# EAGLE board Valve Board (EAGLE 6.2)
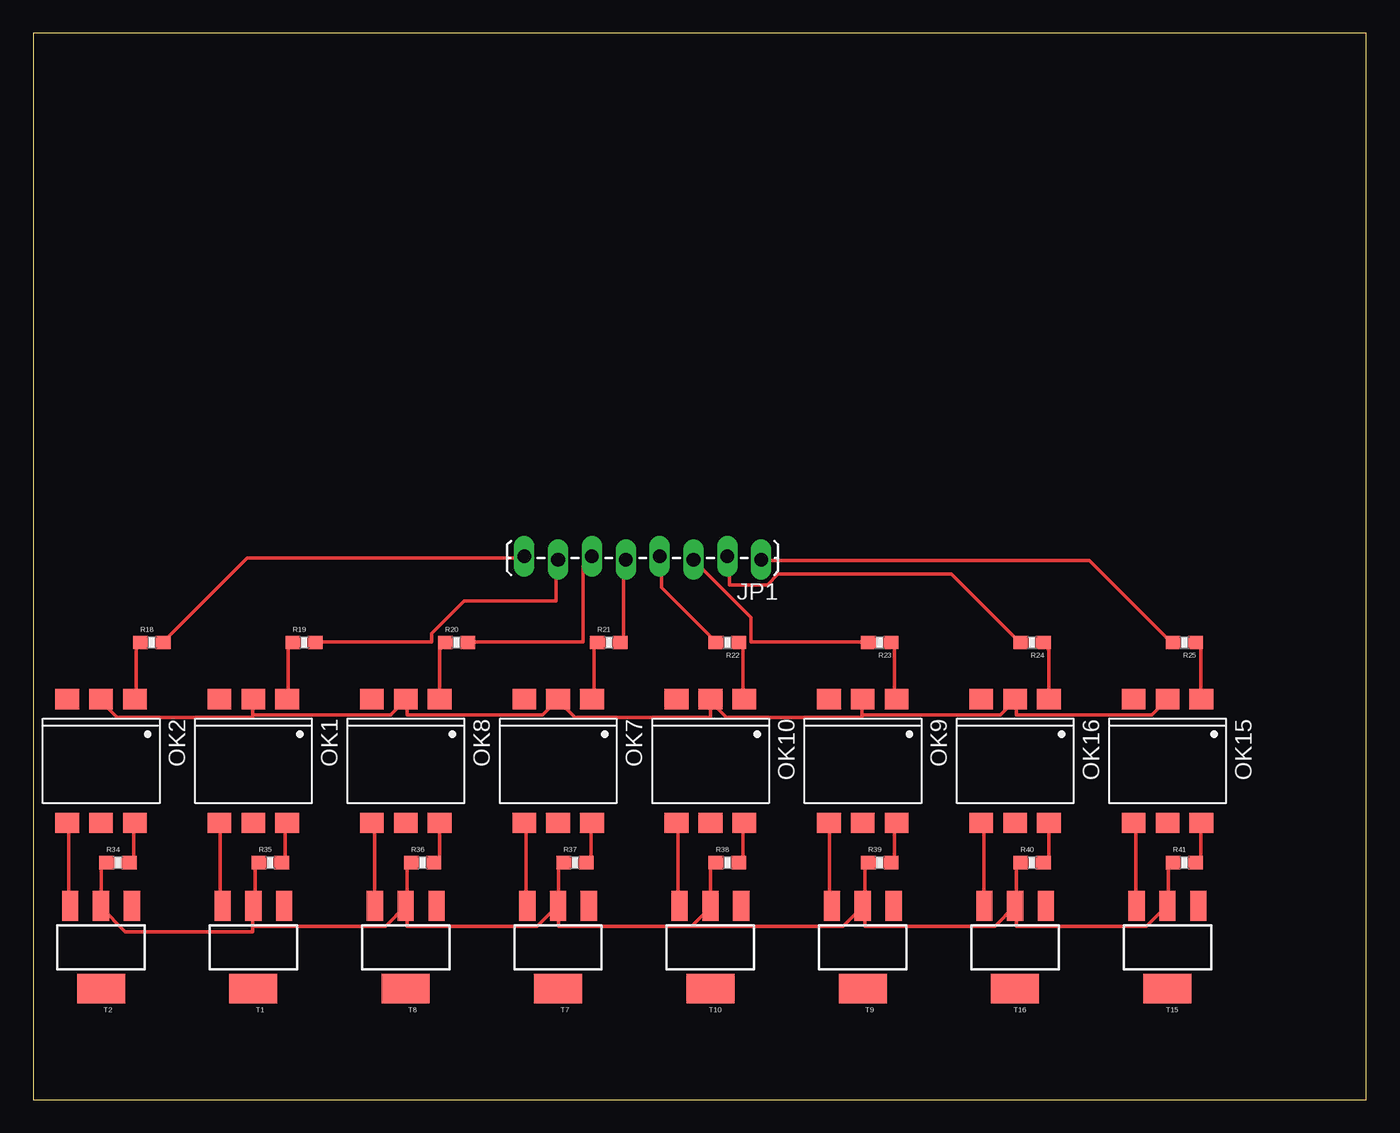
[diagram p0: board, top side]

Size 100 x 80 mm. Coordinates in mm from the lower left corner, seen from the top.
Outline: 0,0 100,0 100,80 0,80 0,0
Copper layers (1*16): Top 0.035mm / dielectric 1.5mm / Bottom 0.035mm
Design rules: minimum track width 10mil, minimum drill 24mil, track to track 8mil, track to pad 8mil, pad to pad 8mil, via to via 8mil, smd to smd 8mil, copper to edge 40mil, drill to drill 8mil, minimum pad ring 10mil, minimum via ring 8mil, stop-mask expansion 4mil, vias tented up to drill 0mil, thermal gap 10mil

## Footprints (pad centres in the part's own frame; a part is rotated, then mirrored left to right if it is on the bottom)
1X08_LOCK_LONGPADS = drill 1.016 long: 1 0,0.127; 2 2.54,-0.127; 3 5.08,0.127; 4 7.62,-0.127; 5 10.16,0.127; 6 12.7,-0.127; 7 15.24,0.127; 8 17.78,-0.127
DIL6-SMD = smd 1.78 x 1.52: 1 -2.54,-4.645; 2 0,-4.645; 3 2.54,-4.645; 4 2.54,4.645; 5 0,4.645; 6 -2.54,4.645
0603-RES = smd 1.1 x 1: 1 -0.85,0; 2 0.85,0
SOT223 = smd 1.219 x 2.235: 1 -2.311,-3.099; 2 0,-3.099; 3 2.311,-3.099 | smd 3.6 x 2.2: 4 0,3.099

## Placement (x,y rotation side)
JP1  [1X08_LOCK_LONGPADS]  54.61,40.64 180 top
OK1  MOC3032S  [DIL6-SMD]  16.51,25.4 180 top
OK2  MOC3032S  [DIL6-SMD]  5.08,25.4 180 top
OK7  MOC3032S  [DIL6-SMD]  39.37,25.4 180 top
OK8  MOC3032S  [DIL6-SMD]  27.94,25.4 180 top
OK9  MOC3032S  [DIL6-SMD]  62.23,25.4 180 top
OK10  MOC3032S  [DIL6-SMD]  50.8,25.4 180 top
OK15  MOC3032S  [DIL6-SMD]  85.09,25.4 180 top
OK16  MOC3032S  [DIL6-SMD]  73.66,25.4 180 top
R18  330  [0603-RES]  8.89,34.29 0 top
R19  330  [0603-RES]  20.32,34.29 0 top
R20  330  [0603-RES]  31.75,34.29 0 top
R21  330  [0603-RES]  43.18,34.29 0 top
R22  330  [0603-RES]  52.07,34.29 180 top
R23  330  [0603-RES]  63.5,34.29 180 top
R24  330  [0603-RES]  74.93,34.29 180 top
R25  330  [0603-RES]  86.36,34.29 180 top
R34  33  [0603-RES]  6.35,17.78 0 top
R35  33  [0603-RES]  17.78,17.78 0 top
R36  33  [0603-RES]  29.21,17.78 0 top
R37  33  [0603-RES]  40.64,17.78 0 top
R38  33  [0603-RES]  52.07,17.78 0 top
R39  33  [0603-RES]  63.5,17.78 0 top
R40  33  [0603-RES]  74.93,17.78 0 top
R41  33  [0603-RES]  86.36,17.78 0 top
T1  LF-TRIACSOT223  [SOT223]  16.51,11.43 180 top
T2  LF-TRIACSOT223  [SOT223]  5.08,11.43 180 top
T7  LF-TRIACSOT223  [SOT223]  39.37,11.43 180 top
T8  LF-TRIACSOT223  [SOT223]  27.94,11.43 180 top
T9  LF-TRIACSOT223  [SOT223]  62.23,11.43 180 top
T10  LF-TRIACSOT223  [SOT223]  50.8,11.43 180 top
T15  LF-TRIACSOT223  [SOT223]  85.09,11.43 180 top
T16  LF-TRIACSOT223  [SOT223]  73.66,11.43 180 top

## Library data of the parts
JP1 = SparkFun-Connectors
OK1 OK2 OK7-OK10 OK15 OK16 = lizardworx; MF: FAIRCHILD SEMICONDUCTOR; MPN: MOC3032S-M; OC_FARNELL: unknown; OC_NEWARK: 05C2871
R18-R25 R34-R41 = SparkFun-Passives
T1 T2 T7-T10 T15 T16 = lizardworx

## Nets
AC_HOT: R34.1 R35.1 R36.1 R37.1 R38.1 R39.1 R40.1 R41.1 T1.2 T2.2 T7.2 T8.2 T9.2 T10.2 T15.2 T16.2
CNTRL_1: JP1.8 R18.2
CNTRL_2: JP1.7 R19.2
CNTRL_3: JP1.6 R20.2
CNTRL_4: JP1.5 R21.2
CNTRL_5: JP1.4 R22.2
CNTRL_6: JP1.3 R23.2
CNTRL_7: JP1.2 R24.2
CNTRL_8: JP1.1 R25.2
GND: OK1.2 OK2.2 OK7.2 OK8.2 OK9.2 OK10.2 OK15.2 OK16.2
N$1: OK9.1 R23.1
N$2: OK1.1 R19.1
N$6: OK1.6 R35.2
N$7: OK9.6 R39.2
N$8: OK1.4 T1.3
N$9: OK2.1 R18.1
N$12: OK2.6 R34.2
N$13: OK9.4 T9.3
N$14: OK2.4 T2.3
N$28: OK10.1 R22.1
N$34: OK10.6 R38.2
N$41: OK10.4 T10.3
N$45: OK7.1 R21.1
N$46: OK7.6 R37.2
N$48: OK7.4 T7.3
N$51: OK8.1 R20.1
N$52: OK8.6 R36.2
N$54: OK8.4 T8.3
N$76: OK15.1 R25.1
N$77: OK15.6 R41.2
N$78: OK15.4 T15.3
N$81: OK16.1 R24.1
N$82: OK16.6 R40.2
N$83: OK16.4 T16.3
STATION_1: T2.1
STATION_2: T1.1
STATION_3: T8.1
STATION_4: T7.1
STATION_5: T10.1
STATION_6: T9.1
STATION_7: T16.1
STATION_8: T15.1

## Tracks (layer width: path | path; a pad name or v marks a point on that pad's centre or on a via)
AC_HOT
  Top 0.254: R41.1 85.34,17.68 85.14,17.48 85.14,14.63 T15.2 84.94,14.43 83.52,13.01 73.76,13.01 73.76,14.43 T16.2 | R40.1 73.97,17.68 73.76,17.48 73.76,14.63 T16.2 | R39.1 62.59,17.68 62.38,17.48 62.38,14.63 T9.2 | R38.1 51.21,17.68 50.8,17.27 T10.2 50.8,14.43 49.38,13.01 | R37.1 39.62,17.68 39.42,17.48 39.42,14.63 T7.2 | R36.1 28.25,17.68 28.04,17.48 28.04,14.63 T8.2 | R34.1 5.49,17.68 5.08,17.27 T2.2 5.08,14.43 6.91,12.6 16.46,12.6 16.46,13.01 | R35.1 16.87,17.68 16.66,17.48 16.66,14.63 T1.2 16.46,14.43 16.46,13.01 | T8.2 26.42,13.01 16.46,13.01 | T7.2 39.22,14.43 37.8,13.01 28.04,13.01 28.04,14.43 T8.2 | 49.38,13.01 39.42,13.01 39.42,14.43 T7.2 | 49.38,13.01 60.76,13.01 62.18,14.43 T9.2 | T16.2 72.14,13.01 62.38,13.01 62.38,14.43 T9.2
CNTRL_1
  Top 0.254: R18.2 9.75,34.34 16.05,40.64 36.78,40.64 JP1.8
CNTRL_2
  Top 0.254: R19.2 21.34,34.34 29.87,34.34 29.87,34.95 32.31,37.39 39.22,37.39 39.22,40.44 JP1.7
CNTRL_3
  Top 0.254: R20.2 32.72,34.34 41.25,34.34 41.25,40.03 41.86,40.64 JP1.6
CNTRL_4
  Top 0.254: R21.2 44.09,34.34 44.3,34.54 44.3,40.44 JP1.5
CNTRL_5
  Top 0.254: R22.2 51.21,34.34 47.14,38.41 47.14,40.64 JP1.4
CNTRL_6
  Top 0.254: R23.2 62.59,34.34 53.85,34.34 53.85,36.17 49.58,40.44 JP1.3
CNTRL_7
  Top 0.254: R24.2 73.97,34.34 68.89,39.42 55.88,39.42 55.07,38.61 52.22,38.61 52.22,40.64 JP1.2
CNTRL_8
  Top 0.254: R25.2 85.34,34.34 79.25,40.44 54.66,40.44 JP1.1
GND
  Top 0.254: 16.46,28.85 16.46,29.87 OK1.2 | 16.46,28.85 16.46,28.65 6.3,28.65 5.08,29.87 OK2.2 | 16.46,28.85 26.82,28.85 27.84,29.87 OK8.2 28.04,29.87 28.04,28.85 38.2,28.85 39.22,29.87 OK7.2 39.42,29.87 40.64,28.65 50.8,28.65 50.8,29.87 | 50.8,29.87 52.02,28.65 62.18,28.65 62.18,28.85 | 62.18,28.85 62.18,29.87 OK9.2 | 62.18,28.85 72.54,28.85 73.56,29.87 OK16.2 73.76,29.87 73.76,28.85 83.92,28.85 84.94,29.87 OK15.2 | 50.8,29.87 OK10.2
N$1
  Top 0.254: R23.1 64.41,34.14 64.62,33.93 64.62,30.07 OK9.1
N$2
  Top 0.254: R19.1 19.3,34.14 19.1,33.93 19.1,30.07 OK1.1
N$6
  Top 0.254: R35.2 18.69,17.88 18.9,18.09 18.9,20.73 OK1.6
N$7
  Top 0.254: R39.2 64.41,17.88 64.62,18.09 64.62,20.73 OK9.6
N$8
  Top 0.254: OK1.4 14.02,20.73 14.02,14.63 T1.3
N$9
  Top 0.254: R18.1 7.92,34.14 7.72,33.93 7.72,30.07 OK2.1
N$12
  Top 0.254: R34.2 7.32,17.88 7.52,18.09 7.52,20.73 OK2.6
N$13
  Top 0.254: OK9.4 59.74,20.73 59.74,14.63 T9.3
N$14
  Top 0.254: OK2.4 2.64,20.73 2.64,14.63 T2.3
N$28
  Top 0.254: R22.1 53.03,34.14 53.24,33.93 53.24,30.07 OK10.1
N$34
  Top 0.254: R38.2 53.03,17.88 53.24,18.09 53.24,20.73 OK10.6
N$41
  Top 0.254: OK10.4 48.36,20.73 48.36,14.63 T10.3
N$45
  Top 0.254: R21.1 42.27,34.14 42.06,33.93 42.06,30.07 OK7.1
N$46
  Top 0.254: R37.2 41.66,17.88 41.86,18.09 41.86,20.73 OK7.6
N$48
  Top 0.254: OK7.4 36.98,20.73 36.98,14.63 T7.3
N$51
  Top 0.254: OK8.1 30.48,33.73 30.89,34.14 R20.1
N$52
  Top 0.254: OK8.6 30.48,18.29 30.07,17.88 R36.2
N$54
  Top 0.254: OK8.4 25.4,20.73 25.6,20.52 25.6,14.63 T8.3
N$76
  Top 0.254: R25.1 87.38,34.14 87.58,33.93 87.58,30.07 OK15.1
N$77
  Top 0.254: R41.2 87.38,17.88 87.58,18.09 87.58,20.73 OK15.6
N$78
  Top 0.254: OK15.4 82.7,20.73 82.7,14.63 T15.3
N$81
  Top 0.254: OK16.1 76.2,33.73 75.79,34.14 R24.1
N$82
  Top 0.254: OK16.6 76.2,18.29 75.79,17.88 R40.2
N$83
  Top 0.254: OK16.4 71.12,20.73 71.32,20.52 71.32,14.63 T16.3